# Altium PCB LoRaUNO868 V2.PcbDoc
Units mm, origin at the board's own origin, x right, y up, seen from the top; angles counter-clockwise.
Board outline 68.6 x 53.34 mm, 2 copper layers (Top Layer, Bottom Layer), stack 1.621 mm thick; 61 components, 57 nets, 269 pads, 268 vias.
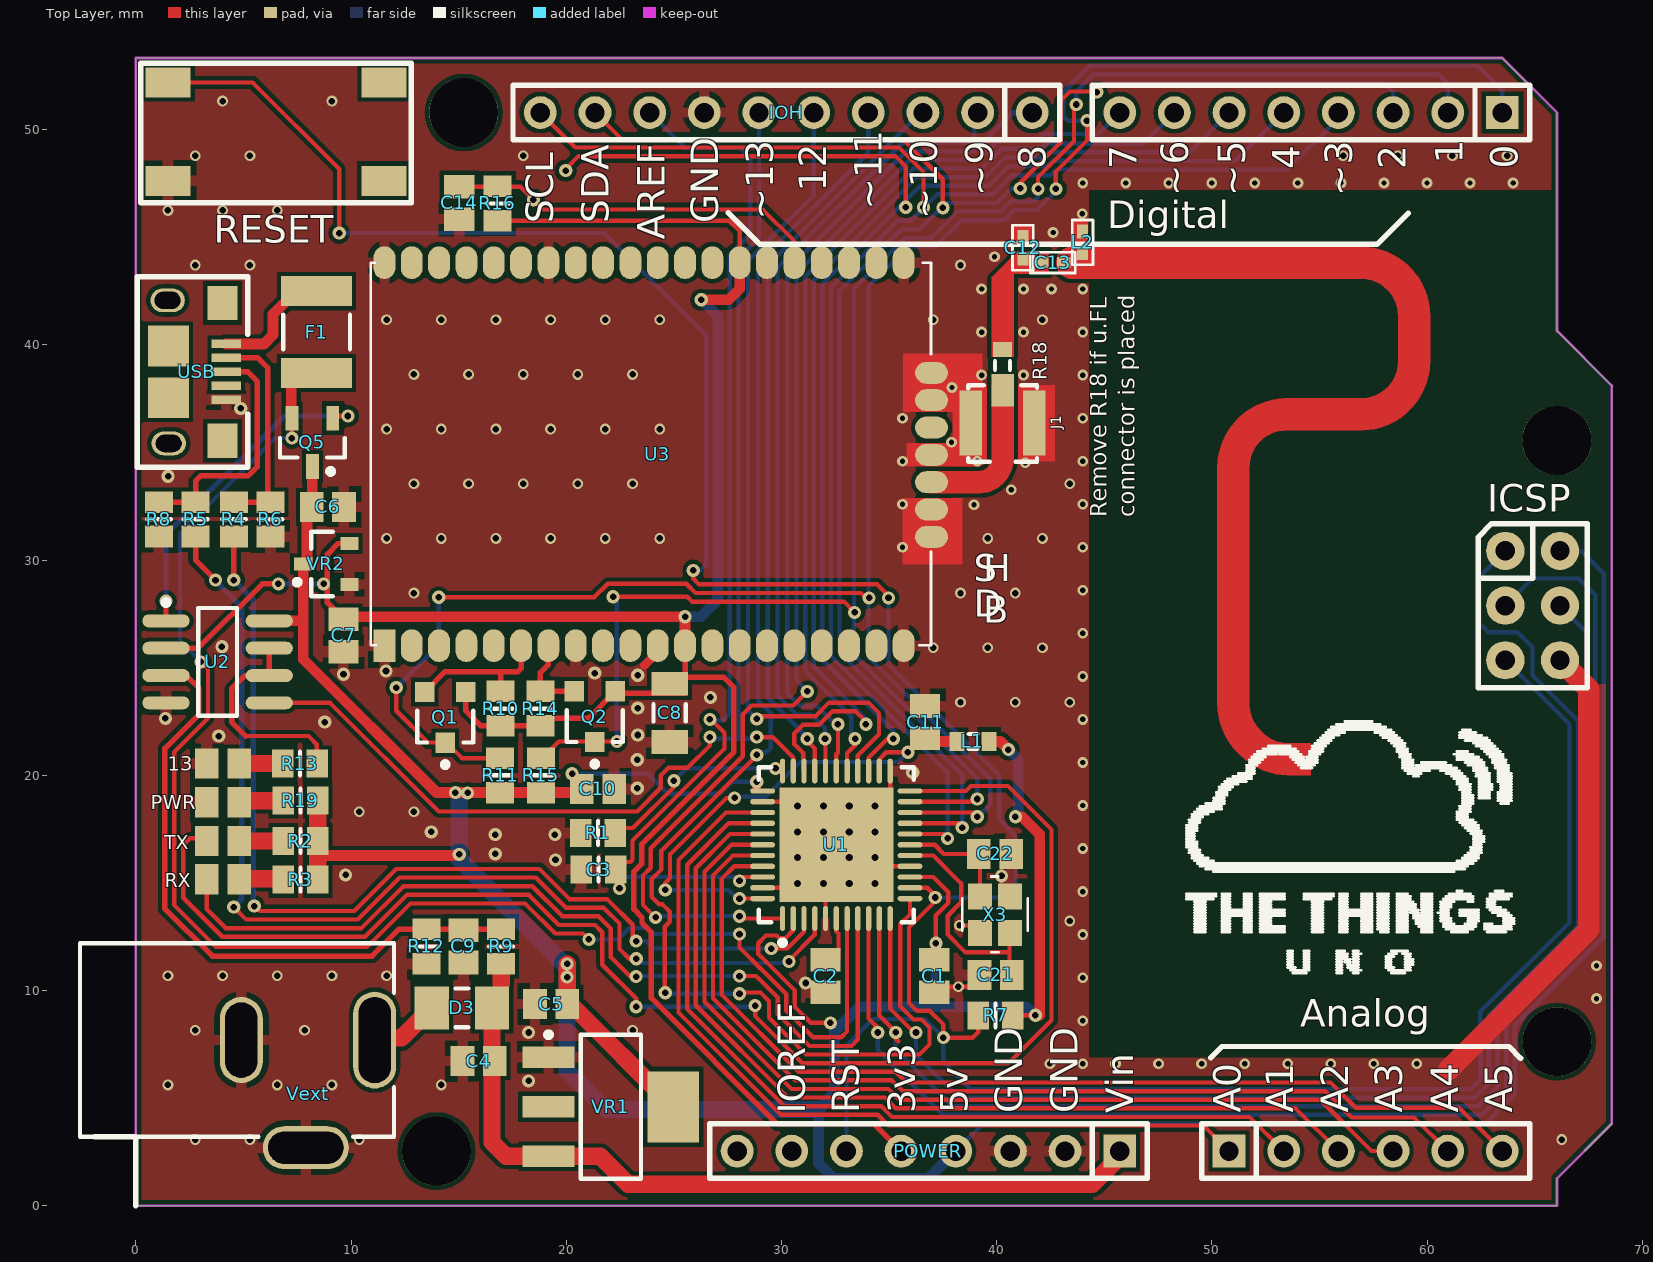
[diagram p0: Top Layer view]
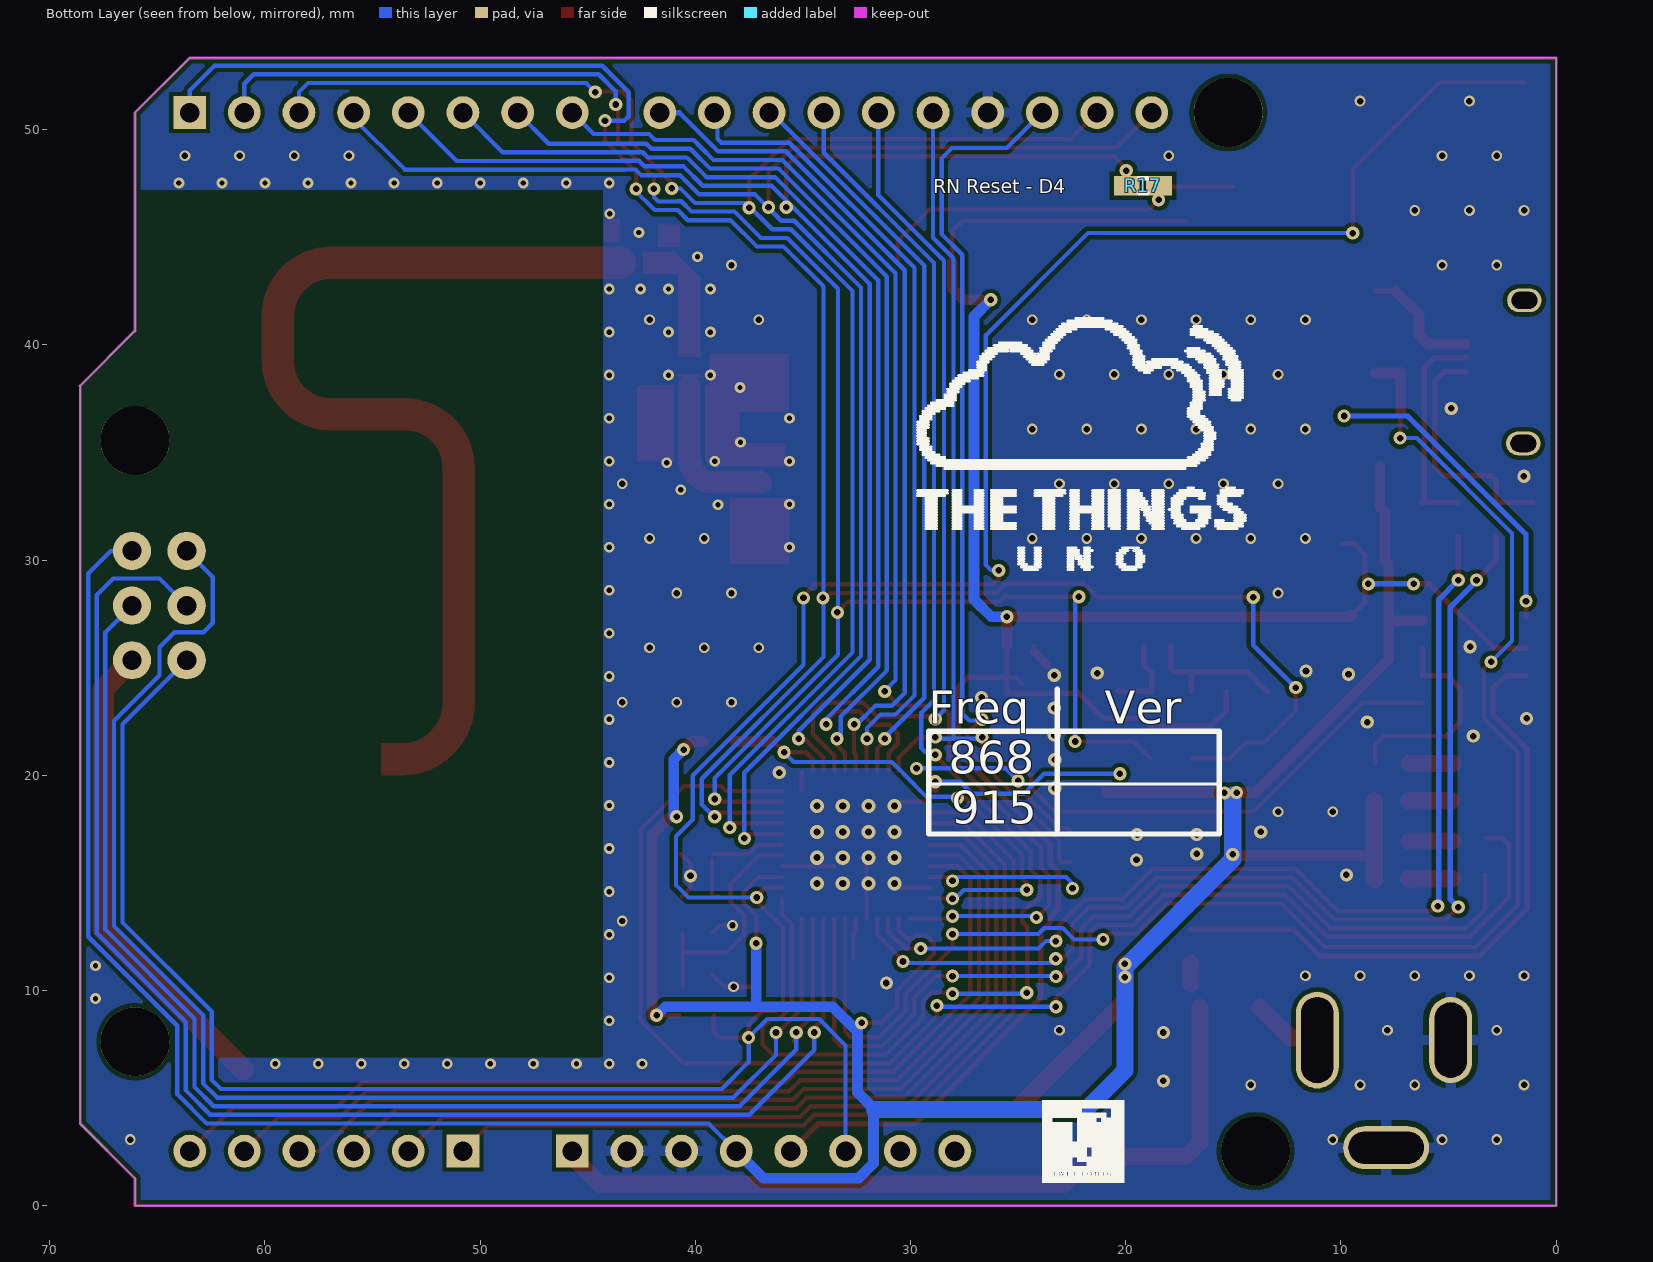
[diagram p1: Bottom Layer view, seen from below]

## Layer stack, top to bottom
Top Solder: solder mask 0.0102, Solder Resist, Dk 3.5
Top Layer: signal copper 0.0356
Dielectric1: core 1.55, FR-4, Dk 4.3
Bottom Layer: signal copper 0.0356
Bottom Solder: solder mask 0.0102, Solder Resist, Dk 3.5

## Board outline
0,0 0,53.34 63.5,53.34 66.04,50.8 66.04,40.64 66.06,40.64 68.6,38.1 68.58,38.1 68.58,3.81 66.04,1.27 66.04,0

## Design rules (kind name [scope] priority, off if disabled: settings)
Clearance [All] p1: gap=0.2
ComponentClearance [All] p1: gap=0.1 collisioncheckmode=3 verticalgap=0.254 showdistances=FALSE
PolygonConnect PolygonConnect_1 [isVia and innet(gnd)] p1: connectstyle=Direct reliefconductorwidth=0.254 reliefentries=4 polygonreliefangle="90 Angle" airgapwidth=0.254
PolygonConnect [All] p2: connectstyle=Relief reliefconductorwidth=0.5 reliefentries=4 polygonreliefangle="90 Angle" airgapwidth=0.254
RoutingVias [All] p1: holewidth=0.711 width=1.27 viastyle="Through Hole" minholewidth=0.711 minwidth=1.27 maxholewidth=0.711 maxwidth=1.27
SilkToSolderMaskClearance SilkscreenOverComponentPads [IsPad] p1 off: minsilkscreentomaskgap=0.254 clearancetoexposedcopper=TRUE
SolderMaskExpansion [All] p1: expansion=0.102
Width [All] p1: maxlimit=2 minlimit=0.2 preferedwidth=0.2
28 further rules are at their usual default settings.

## Components (designator, comment, footprint, x,y, rotation, side; value= is the part's Value field where it differs from the comment)
13 "LED0" C0805 4.05,20.55 r180 top
Analog "AD" "HEADER 6X1 8.5MM" 50.8,2.54 r0 top locked (schematic designator AD)
C1 "Cap" C0805 37.1,10.675 r270 top
C2 "Cap" C0805 32.05,10.675 r270 top
C3 "100nF" 6-0805_L 21.5,15.625 r0 top
C4 "Cap" C0805 15.925,6.725 r0 top
C5 "Cap" C0805 19.3,9.375 r0 top
C6 "Cap" C0805 8.925,32.475 r180 top
C7 "Cap" C0805 9.65,26.5 r90 top
C8 "Cap" C1206 24.8,22.9 r90 top
C9 "Cap" C0805 15.225,12.05 r90 top
C10 "Cap" C0805 21.475,19.375 r0 top
C11 "Cap" C0805 36.675,22.475 r90 top
C12 "TBD" 0402C-TBD 41.225,45.025 r270 top
C13 "TBD" 0402C-TBD 42.1,43.825 r0 top
C14 "Cap" C0805 15.025,46.6 r270 top
C21 "Cap" C0805 39.95,10.725 r0 top
C22 "Cap" C0805 39.925,16.35 r180 top
D3 "Diode" 3216[1206] 15.15,9.2 r0 top
Digital "IOL" "HEADER 8X1 8.5MM" 63.5,50.8 r180 top locked (schematic designator IOL)
F1 "Fuse 1" 1812 8.4,40.6 r90 top
ICSP "ICSP" ICSP 63.64,30.43 r0 top locked
IOH "IOH" "HEADER 10X1 8.5MM" 41.656,50.8 r180 top locked
J1 "U.FL-R-SMT" U.FL-R-SMT 40.275,36.375 r180 top
L1 "Inductor" J1-0603#1 38.9,21.575 r180 top
L2 "TBD" 0402C-TBD 44,45.275 r270 top
POWER "POWER_UNO" "HEADER 8X1 8.5MM" 45.72,2.54 r180 top locked
PWR "LED0" C0805 4.05,18.75 r180 top
Q1 "BSS138" SOT23 14.375,22.7 r180 top
Q2 "BSS138" SOT23 21.325,22.725 r180 top
Q5 "MOSFET-P" SOT23_N 8.2,35.475 r270 top
R1 "Res1" 6-0805_L 21.475,17.325 r0 top
R2 "Res1" 6-0805_L 7.65,16.95 r0 top
R3 "Res1" 6-0805_L 7.65,15.15 r0 top
R4 "Res1" 6-0805_L 4.55,31.9 r90 top
R5 "Res1" 6-0805_L 2.775,31.9 r90 top
R6 "Res Varistor" 6-0805_L 6.25,31.9 r90 top
R7 "Res1" 6-0805_L 39.95,8.85 r0 top
R8 "Res Varistor" 6-0805_L 1.075,31.9 r90 top
R9 "Res1" 6-0805_L 16.975,12.05 r270 top
R10 "Res1" 6-0805_L 16.95,23.1 r270 top
R11 "Res1" 6-0805_L 16.925,20 r270 top
R12 "Res1" 6-0805_L 13.5,12.05 r270 top
R13 "Res1" 6-0805_L 7.625,20.55 r0 top
R14 "Res1" 6-0805_L 18.8,23.1 r270 top
R15 "Res1" 6-0805_L 18.825,20 r270 top
R16 "Res1" 6-0805_L 16.8,46.575 r90 top
R17 "Res1" J1-0603#2 19.2,47.4 r180 bottom
R18 "Res1" J1-0603#1 40.275,39.05 r90 top
R19 "Res1" 6-0805_L 7.65,18.825 r0 top
RESET "SW-PB" BUTTON 1.5,52.2 r0 top
RX "LED0" C0805 4.05,15.175 r180 top
TX "LED0" C0805 4.05,16.95 r180 top
U1 "ATmega32U4-MU" 44PW_M 32.55,16.775 r90 top
U2 "LMV358M" M08A_N 3.8,25.275 r0 top
U3 "RN2483" "RN2483 - duplicate" 35.675,26.025 r90 top
USB "Header 5" 10118193-0001LF 4.875,38.75 r270 top
Vext "PWR2.5" "DC - JACK" -2.55,3.25 r0 top
VR1 "Volt Reg" SOT223_N 22.075,4.6 r0 top
VR2 "Volt Reg" SOT23_L 8.85,29.825 r180 top
X3 "16 Mhz" BT-XTAL_2520 39.925,13.525 r90 top

## Footprints (in the part's own frame and the unit in brackets; to place one, negate y for a bottom-side part, rotate by r counter-clockwise, add the part's x,y. Pads: shape width x height; smd on the part's side, far side on the other; paste and mask are expansions set on the pad)
6-0805_L [mm] "Chip Resistor, Body 2.0x1.2mm, IPC High Density"
  rect 1x1.3 smd: 1(-0.8,0) 2(0.8,0)
  silkscreen extent 0,-0.55 0,0.55, body extent -1.07,-0.7 1.07,0.7, height 0.7
44PW_M [mm] "QFN, 44-Leads, Body 7x7mm, Pitch 0.5mm, IPC Low Density"
  oval 1.15x0.25 smd: 1(-3.425,2.5) 2(-3.425,2) 3(-3.425,1.5) 4(-3.425,1) 5(-3.425,0.5) 6(-3.425,0) 7(-3.425,-0.5) 8(-3.425,-1) 9(-3.425,-1.5) 10(-3.425,-2) 11(-3.425,-2.5) 23(3.425,-2.5) 24(3.425,-2) 25(3.425,-1.5) 26(3.425,-1) 27(3.425,-0.5) 28(3.425,0) 29(3.425,0.5) 30(3.425,1) 31(3.425,1.5) 32(3.425,2) 33(3.425,2.5)
  oval 0.25x1.15 smd: 12(-2.5,-3.425) 13(-2,-3.425) 14(-1.5,-3.425) 15(-1,-3.425) 16(-0.5,-3.425) 17(0,-3.425) 18(0.5,-3.425) 19(1,-3.425) 20(1.5,-3.425) 21(2,-3.425) 22(2.5,-3.425) 34(2.5,3.425) 35(2,3.425) 36(1.5,3.425) 37(1,3.425) 38(0.5,3.425) 39(0,3.425) 40(-0.5,3.425) 41(-1,3.425) 42(-1.5,3.425) 43(-2,3.425) 44(-2.5,3.425)
  rect 5.3x5.3 smd: 45(0,0)
  silkscreen extent -4.67,-3.6 3.6,3.6, body extent -3.57,-3.57 3.57,3.57, height 1
0402C-TBD [mil]
  rect 25x20 smd: 1(0,0) 2(40,0)
  silkscreen extent -21,-19 61,19, body extent 2,-9 39,9, height 19
1812 [mm] "Chip Capacitor, Body 4.5x3.2mm, IPC High Density"
  rect 1.4x3.3 smd: 1(-1.9,0) 2(1.9,0)
  silkscreen extent -0.8,-1.55 0.8,1.55, body extent -2.4,-1.7 2.4,1.7, height 1.4
3216[1206] [mm] "Metal Electrode Face (MELF) Resistor; Body 3.2 x 1.8 mm (LxDia)"
  rect 1.6x2 smd: 1(-1.4,0) 2(1.4,0)
  silkscreen extent -0.3,-0.9 0.3,0.9
10118193-0001LF [mm] "Mirco USB Connector"
  rect 0.4x1.35 smd: 1(-1.3,-0.675) 2(-0.65,-0.675) 3(0,-0.675) 4(0.65,-0.675) 5(1.3,-0.675)
  oval 1.1x1.6 hole 0.8 slot 1.2 at 90 deg: ""(-3.325,-3.4) ""(3.325,-3.35)
  rect 1.6x1.4 smd: ""(-3.2,-0.85) ""(3.2,-0.85)
  rect 1.9x1.9 smd: ""(-1.2,-3.35) ""(1.2,-3.35)
  silkscreen extent -4.43,-4.8 4.43,0.33, body extent -3.98,-6.01 4.01,-0.59, height 2.77
BT-XTAL_2520 [mm]
  rect 1.2x1.1 smd: 1(-0.85,-0.7) 2(0.85,-0.7) 3(0.85,0.7) 4(-0.85,0.7)
  body extent -1.25,-1 1.27,1, height 0.56
BUTTON [mm]
  rect 2.1x1.4 smd: 1(0,0) 1(10.033,0) 2(0,-4.572) 2(10.033,-4.572)
  silkscreen extent -1.27,-5.59 11.3,0.89, body extent 1.14,-5.33 8.89,0.76, height 3
C0805 [mm] "Chip Capacitor, Body 2.0x1.3mm, IPC High Density"
  rect 1.1x1.4 smd: 1(-0.75,0) 2(0.75,0)
  body extent -1.1,-0.72 1.1,0.72, height 1.4
C1206 [mm] "Chip Capacitor, Body 3.2x1.6mm, IPC High Density"
  rect 1.1x1.7 smd: 1(-1.35,0) 2(1.35,0)
  silkscreen extent -0.4,-0.75 0.4,0.75, body extent -1.7,-0.9 1.7,0.9, height 1.3
"DC - JACK" [mm]
  oval 2x4.5 hole 1.5 slot 4 at 90 deg: 1(13.65,4.45)
  oval 2x4 hole 1.5 slot 3.5 at 90 deg: 2(7.45,4.45)
  oval 4x2 hole 1.5 slot 3.5 at 0 deg: 3(10.45,-0.55)
  silkscreen extent -0.05,-0.05 14.55,8.95, body extent -0.53,-0.62 13.87,8.92, height 11.2
"HEADER 6X1 8.5MM" [mil] "Stackable 6 pin header"
  rect 60x60 hole 35.43: 1(0,0)
  round 60 hole 35.43: 2(100,0) 3(200,0) 4(300,0) 5(400,0) 6(500,0)
  silkscreen extent -50,-50 550,50, body extent -50,-50 550,50, height 335
"HEADER 8X1 8.5MM" [mil] "Stackable 8 pin header"
  rect 60x60 hole 35.43: 1(0,0)
  round 60 hole 35.43: 2(100,0) 3(200,0) 4(300,0) 5(400,0) 6(500,0) 7(600,0) 8(700,0)
  silkscreen extent -50,-50 750,50, body extent -50,-50 750,50, height 335
"HEADER 10X1 8.5MM" [mil] "Stackable 10 pin header"
  round 60 hole 35.43: 1(0,0) 2(100,0) 3(200,0) 4(300,0) 5(400,0) 6(500,0) 7(600,0) 8(700,0) 9(800,0) 10(900,0)
  silkscreen extent -50,-50 950,50, body extent -50,-50 950,50, height 335
ICSP [mil]
  round 70 hole 35.43: 1(0,0) 2(100,0) 3(0,-100) 4(100,-100) 5(0,-200) 6(100,-200)
  silkscreen extent -50,-250 150,50, body extent -50,-250 150,50, height 485
J1-0603#1 [mm] "Chip Resistor, Body 1.6x0.8mm, IPC High Density"
  rect 0.7x0.9 smd: 1(-0.75,0) 2(0.75,0)
  silkscreen extent -0.2,-0.35 0.2,0.35, body extent -0.85,-0.48 0.85,0.48, height 0.9
J1-0603#2 [mm] "Chip Resistor, Body 1.6x0.8mm, IPC High Density"
  rect 1.2x0.9 smd: 1(-0.75,0) 2(0.75,0)
  silkscreen extent -0.2,-0.35 0.2,0.35, body extent -0.85,-0.48 0.85,0.48, height 0.9
M08A_N [mm] "SOIC, 8-Leads, Body 4.9x3.9mm, Pitch 1.27mm, IPC Medium Density"
  oval 2.2x0.6 smd: 1(-2.4,1.905) 2(-2.4,0.635) 3(-2.4,-0.635) 4(-2.4,-1.905) 5(2.4,-1.905) 6(2.4,-0.635) 7(2.4,0.635) 8(2.4,1.905)
  silkscreen extent -2.52,-2.5 0.9,2.88, body extent -2,-2.5 2,2.5, height 1.75
"RN2483 - duplicate" [mil]
  rect 60x40 smd: 1(0,949.8)
  oval 60x40 smd: 2(0,899.8) 3(0,849.8) 4(0,799.8) 5(0,749.8) 6(0,699.8) 7(0,649.8) 8(0,599.8) 9(0,549.8) 10(0,499.8) 11(0,449.8) 12(0,399.8) 13(0,349.8) 14(0,299.8) 15(0,249.8) 16(0,199.8) 17(0,149.8) 18(0,99.8) 19(0,49.8) 20(0,-0.2) 28(700.79,-0.2) 29(700.79,49.8) 30(700.79,99.8) 31(700.79,149.8) 32(700.79,199.8) 33(700.79,249.8) 34(700.79,299.8) 35(700.79,349.8) 36(700.79,399.8) 37(700.79,449.8) 38(700.79,499.8) 39(700.79,549.8) 40(700.79,599.8) 41(700.79,649.8) 42(700.79,699.8) 43(700.79,749.8) 44(700.79,799.8) 45(700.79,849.8) 45(700.79,899.8) 47(700.79,949.8)
  oval 40x60 smd: 21(199.21,-51.18) 22(249.21,-51.18) 23(299.21,-51.18) 24(349.21,-51.18) 25(399.21,-51.18) 26(449.21,-51.18) 27(499.21,-51.18)
  body extent 0,-48 700,973, height 71
SOT23 [mm] "SOT-23; 3 Leads; Body 3.1 x 2.5 mm, inc. leads (LxW max), Alternate Lead Configuration"
  rect 0.9x0.95 smd: 1(0,1.175) 2(0.95,-1.175) 3(-0.95,-1.175)
  silkscreen extent -1.3,-0.3 1.3,2.32
SOT23_L [mm] "SOT23, 3-Leads, Body 2.9x1.3mm, Pitch 0.95mm, Lead Span 2.3mm - Reverse Pinning, IPC High Density"
  rect 0.85x0.6 smd: 1(1.075,0) 2(-1.075,-0.95) 3(-1.075,0.95)
  silkscreen extent -0.3,-1.5 1.47,1.5, body extent -0.7,-1.5 0.7,1.5, height 1.1
SOT23_N [mm] "SOT23, 3-Leads, Body 2.9x1.3mm, Pitch 0.95mm, Lead Span 2.3mm - Reverse Pinning, IPC Medium Density"
  rect 1.15x0.6 smd: 1(1.125,0) 2(-1.125,-0.95) 3(-1.125,0.95)
  silkscreen extent -0.2,-1.5 1.47,1.5, body extent -0.7,-1.5 0.7,1.5, height 1.1
SOT223_N [mm] "SOT223, 4-Leads, Body 6.5x3.5mm, Pitch 2.3mm, Lead Span 7mm, IPC Medium Density"
  rect 2.4x1 smd: 1(-2.9,2.3) 2(-2.9,0) 3(-2.9,-2.3)
  rect 2.4x3.3 smd: 4(2.9,0)
  silkscreen extent -3.02,-3.35 1.4,3.47, body extent -1.85,-3.35 1.85,3.35, height 1.7
U.FL-R-SMT [mm]
  rect 1.05x1.5 smd: 1(0,-1.525)
  rect 1.05x3 smd: 2(-1.475,0) 3(1.475,0)
  silkscreen extent -1.6,-1.75 1.6,1.8, body extent -1.5,-1.55 1.5,1.55, height 1.25

## Part data
13 PWR RX TX: "Typical INFRARED GaAs LED"
C1 C2 C4 C5 C6 C7 C8 C9 C10 C11 C14 C21 C22: "Capacitor"
C3 C12 C13: library part Cap, "Capacitor, X7R"
D3: "Default Diode"
F1: "Fuse"
L2: library part Inductor, "Inductor"
Q1 Q2: "N-Channel Enhancement Mode Vertical DMOS FET"
Q5: "P-Channel MOSFET"
R1 R2 R3 R4 R5 R7 R9 R10 R11 R12 R13 R14 R15 R16 R17 R18 R19: "Resistor"
R6 R8: "Varistor (Voltage-Sensitive Resistor)"
RESET: "Switch"
U1: "8-bit AVR Microcontroller, 2.7-5.5V, 32KB Flash, 2.5KB EEPROM, 1KB SRAM, USB Controller, 44-pin QFN, Industrial Grade (-40°C to 85°C)"
U2: "General Purpose, Low Voltage, Rail-to-Rail Output Operational Amplifiers, 8-pin Narrow SOIC"
USB: "Header, 5-Pin"
Vext: "Low Voltage Power Supply Connector"
VR1 VR2: "Voltage Regulator"
X3: library part NX2520SA-16MHZ-STD-CSW-5, "XTAL SMD 2520, 16MHz, 8pF, ±15ppm"

## Free pads (board coordinates)
  round 3.2 hole 3.2 unplated: 0(13.97,2.54) 0(15.24,50.8) 0(66.04,7.62) 0(66.04,35.56)

## Via types
v1: diameter 0.61, hole 0.305, Top Layer to Bottom Layer, tented both sides, 113 vias
v2: diameter 0.5, hole 0.3, Top Layer to Bottom Layer, tented both sides, 78 vias
v3: diameter 0.5, hole 0.25, Top Layer to Bottom Layer, 61 vias
v4: diameter 0.66, hole 0.33, Top Layer to Bottom Layer, tented top, 16 vias

## Nets (pads, with @x,y where several pads share a name; then routed paths per layer and width w, separated by ;. In a path a pad name is that pad's centre, name@x,y a point inside that pad or via, vN(x,y) a via of type N, cw(c..) or ccw(c..) an arc to the next point about the centre after c; other vN are vias at no path point)
+3.3V: C7.2 C8.2 POWER.5 Q1.3 Q2.3 R10.2 R14.2 R16.1 U2.2 U3.12 U3.34 VR2.2 | length 110.9
  Top Layer w0.2: R16.1@17.175,45.775 27.575,45.775 28.06,45.29 U3.34 ; C8.2 25.1,24.55 C8.2@25.52,24.55
  Top Layer w0.254: U2.2 2.885,25.91 5.875,28.9 v1(6.625,28.9) ; C7.2@9.475,27.45 8.9,28.025 8.9,30.275 9.4,30.775 VR2.2 ; Q1.3 15.325,23.004 16.029,22.3 R10.2 R14.2 19.15,22.65 21.025,22.65 Q2.3 ; Q2.3@22.275,23.825 25.525,23.825 25.52,23.83 C8.2@25.52,24.55 ; U3.12 C8.2@25.52,24.55 ; POWER.5 34.3,3.8 29.8,3.8 23.957,9.643 23.957,12.702 23.519,13.139 23.519,13.406 23.143,13.782 23.143,15.522 23.502,15.881 23.502,16.792 27.777,21.067 27.777,24.098 27.325,24.55 C8.2@25.52,24.55
  Top Layer w0.5: C7.2@9.475,27.45 9.555,27.37 v1(25.52,27.37) U3.12 ; v1(26.275,42.1) 27.55,42.1 28.06,42.61 U3.34
  Bottom Layer w0.254: v1(6.625,28.9) v1(8.725,28.9)
  Bottom Layer w0.5: v1(25.52,27.37) 26.245,27.37 27.05,28.175 27.05,41.325 v1(26.275,42.1)
+5V: C1.1 C5.2 C6.2 C10.1 ICSP.2 L1.1 POWER.4 Q5.1 R2.2 R3.2 R7.2 R11.2 R15.2 R19.2 U1.2 U1.14 U1.34 U2.8 VR1.4 VR2.1 | length 192.3
  Top Layer w0.2: VR2.1 VR2.1@7.95,30 ; C6.2@7.95,32.25 C6.2 ; C5.2 C5.2@20.2,9.375 ; C10.1@20.875,19.2 C10.1@21.075,19.4 ; U1.2 30.55,12.799 30.176,12.425 29.907,12.425 29.777,12.555 29.276,12.555 28.922,12.201 28.922,11.7 29.276,11.346 29.283,11.346 30.625,10.004 30.625,9.236 31.361,8.5 v1(32.275,8.5) ; U1.14 37.055,15.275 37.755,14.576 37.755,14.074 37.175,13.495 v1(37.175,12.2) ; R7.2 v1(41.8,8.85)
  Top Layer w0.4: U1.34@28.851,19.375 v1(28.851,19.701)
  Top Layer w0.5: U2.8 7.73,27.18 ; VR2.1 7.775,25.4 13.975,19.2 R11.2 R15.2 C10.1@20.875,19.2 ; VR2.1@7.95,30 C6.2@7.95,32.25 ; C6.2@8.2,32.5 Q5.1 ; 8.45,16.275 v1@14.8,16.275 ; L1.1 40.175,21.575 v1(40.55,21.2) ; v1(40.875,18.075) 41.175,18.075 42,17.25 v1@42,8.85
  Top Layer w0.8: R3.2 R19.2 ; C5.2 v1@20.05,11.238 ; C5.2@20.2,9.375 VR1.4
  Bottom Layer w0.2: v1(20.275,20.075) 23.8,20.075 24.73,19.145 27.145,19.145 27.701,19.701 v1(28.851,19.701) ; POWER.4 39.385,3.825 62.713,3.825 64.075,5.187 64.075,8.362 68.217,12.504 68.217,29.383 67.17,30.43 ICSP.2
  Bottom Layer w0.5: 31.675,4.475 32.47,5.27 32.47,8.095 33.625,9.25 37.175,9.25 ; 31.725,4.475 31.725,1.975 32.425,1.275 36.835,1.275 POWER.4 ; v1(37.175,12.2) 37.175,9.25 ; v1(40.55,21.2) 41,20.75 v1@41,18.075 ; v1(41.8,8.85) 41.4,9.25 37.175,9.25
  Bottom Layer w0.8: v1@15.025,19.075 15.025,16.095 20.038,11.083 20.038,6.287 21.85,4.475 31.675,4.475
  other v1: 20.038,10.625 20.038,11.238 15.025,16.325 15.413,19.188 14.85,19.2
AD0: Analog.1 U1.36 | length 40.2
  Top Layer w0.2: U1.36 29.12,18.27 27.42,18.27 25.22,16.07 25.22,14.935 25.22,8.984 29.977,4.227 34.477,4.227 34.979,3.725 49.615,3.725 Analog.1
AD1: Analog.2 U1.37 | length 41.5
  Top Layer w0.2: U1.37 27.547,17.775 25.62,15.849 25.62,15.101 25.62,9.149 30.143,4.627 34.643,4.627 35.145,4.125 51.755,4.125 Analog.2
AD2: Analog.3 U1.38 | length 42.8
  Top Layer w0.2: U1.38 27.612,17.275 26.02,15.683 26.02,15.266 26.02,9.315 30.308,5.027 34.808,5.027 35.31,4.525 53.895,4.525 Analog.3
AD3: Analog.4 U1.39 | length 44.1
  Top Layer w0.2: U1.39 27.678,16.775 26.42,15.517 26.42,15.432 26.42,9.481 30.474,5.427 34.974,5.427 35.476,4.925 55.035,4.925 57.42,2.54 Analog.4
AD4: Analog.5 U1.40 | length 45.5
  Top Layer w0.2: U1.40 27.744,16.275 26.82,15.352 26.82,9.646 30.64,5.827 35.14,5.827 35.642,5.325 55.277,5.325 56.502,4.1 59.4,4.1 Analog.5
AD5: Analog.6 U1.41 | length 46.8
  Top Layer w0.2: U1.41 27.809,15.775 27.22,15.186 27.22,9.812 30.805,6.227 35.305,6.227 35.807,5.725 55.519,5.725 56.69,4.554 61.486,4.554 Analog.6
ANT: C13.2 L2.2 | length 45.7
  Top Layer w1.5: 43.5,43.825 56.925,43.825 cw(c56.925,41.35) 58.675,43.1 cw(c56.925,41.35) 59.4,41.35 59.4,39.25 ; 51.744,21.554 cw(c53.54,23.35) 51,23.35 51,34.3 cw(c53.475,34.3) 53.475,36.775 56.925,36.775 ccw(c56.925,39.25) 59.4,39.25 ; 51.81,21.487 ccw(c53.606,23.283) 53.606,20.743 53.775,20.743
ANT50: J1.1 R18.1 U3.23 | length 7.2
  Top Layer w1.05: U3.23 39.201,33.625 ccw(c39.201,34.649) 39.925,33.925 ccw(c39.08,34.77) 40.275,34.77 J1.1@40.275,38.05
AREF: C3.2 IOH.8 U1.42 | length 49.4
  Top Layer w0.2: C3.2@22.575,15.975 22.975,15.975 23.075,16.075 23.075,16.969 27.35,21.244 27.35,21.978 26.727,22.601 v1(26.676,22.601) 26.676,22.574 26.7,22.55 v1@26.75,22.6 ; v1(28.05,15.1) 28.225,15.275 U1.42
  Bottom Layer w0.2: v1(22.475,14.75) 22.475,14.975 22.78,15.28 27.92,15.28 28.05,15.15 v1(28.05,15.1) 28,15.1 v1@27.975,15.075 ; IOH.8 25.526,49.15 28.075,49.15 28.556,48.669 28.556,45.151 27.6,44.195 27.6,22.875 27.275,22.55 26.727,22.55 v1(26.676,22.601)
D+: R5.1 U1.4 | length 50.3
  Top Layer w0.2: v1(4.55,13.875) 5.125,13.3 10.315,13.3 12.265,15.25 18.584,15.25 19.984,13.85 21.734,13.85 22.471,13.113 22.471,11.929 22.924,11.476 v1(23.251,11.476) ; v1(30.35,11.35) 30.35,11.3 30.3,11.35 31.55,12.6 U1.4
  Top Layer w0.254: R5.1 2.775,30 v1(3.7,29.075)
  Bottom Layer w0.2: v1@23.25,11.477 23.447,11.28 v1@30.35,11.28
  Bottom Layer w0.254: v1@3.678,29.053 4.925,27.807 4.925,14.25 v1@4.425,13.75 ; v1(3.7,29.075) v1@3.75,29.125
D-: R4.1 U1.3 | length 47.2
  Top Layer w0.2: v1(5.5,13.925) 5.525,13.925 5.75,13.7 10.149,13.7 12.099,15.65 18.75,15.65 20.15,14.25 21.9,14.25 23.092,13.058 23.092,12.458 v1(23.25,12.3) ; v1(29.526,11.951) 29.531,11.955 30.272,11.955 31.05,12.733 U1.3
  Top Layer w0.254: v1(4.55,29.075) R4.1
  Bottom Layer w0.2: v1(23.25,12.3) 23.699,12.3 ; v1@23.25,12.375 v1@23.42,12.205 ; 23.699,12.301 24.049,11.951 v1(29.526,11.951)
  Bottom Layer w0.254: v1(4.55,29.075) 5.45,28.175 5.45,14.125 5.425,14.1 5.5,14.025 v1(5.5,13.925) v1@5.425,14
GND: 13.2 C1.2 C2.2 C3.1 C4.1 C5.1 C6.1 C7.1 C8.1 C9.1 C10.2 C11.2 C12.1 C14.2 C21.1 C22.1 ICSP.6 IOH.7 J1.2 J1.3 L2.1 POWER.2 POWER.3 PWR.2 R1.1 R6.1 R8.1 R12.2 RESET.2@1.5,47.628 U1.5 U1.15 U1.23 U1.35 U1.43 U1.45 U2.4 U3.1 U3.8 U3.11 U3.20 U3.21 U3.22 U3.24 U3.26 U3.27 U3.28 U3.33 U3.41 U3.47 USB.5 Vext.2 Vext.3 VR1.1 VR2.3 X3.2 X3.4 | length 39.7
  Top Layer w0.2: U3.11@24.25,25.739 U3.11 ; U1.43 U1.45@30.55,14.775 ; U1.35 U1.45@30.55,18.775 ; U1.5 U1.45@32.05,16.275 ; U1.45@33.55,15.775 U1.15 ; U1.45@35.05,19.275 U1.23 ; C1.2 37.35,10.175 v2(38.225,10.175) 38.65,10.175 C21.1 ; v2(38.275,13.025) 38.875,13.025 X3.4 ; X3.2 40.225,14.775 v1(40.225,15.325) 40.225,15.9 C22.1
  Top Layer w0.254: v3@38.911,34.582 ccw(c39.128,34.778) 39.421,34.798 ; v3@38.941,34.593 ccw(c38.936,34.921) J1.3@39.264,34.917
  Top Layer w0.4: 23.632,25.121 U3.11@24.25,25.739
  Top Layer w1: 61,6.325 67.525,12.85 67.525,24.005 ICSP.6
  other v1: 18.25,5.8 18.25,8.05 31.125,10.35 9.75,15.375 19.5,16.075 16.7,16.35 16.7,17.25 19.475,17.25 13.725,17.375 23.3,19.4 36.1,20.125 23.3,20.725 3.85,21.825 23.325,21.875 8.775,22.475 1.375,22.65 23.325,23.125 26.7,23.625 23.325,24.65 9.65,24.7 21.325,24.75 11.625,24.85 4,25.975 1.5,33.9 4.875,37.05
  other v2: 2.76,3.073 5.3,3.073 10.38,3.073 66.26,3.073 1.49,5.613 6.57,5.613 9.11,5.613 14.19,5.613 2.76,8.153 7.84,8.153 23.08,8.153 1.49,10.693 4.03,10.693 6.57,10.693 9.11,10.693 11.65,10.693 43.4,13.233 10.38,18.313 12.92,18.313 38.32,23.393 40.86,23.393 43.4,23.393 37.05,25.933 39.59,25.933 42.13,25.933 12.92,28.473 38.32,28.473 40.86,28.473 11.65,31.013 14.19,31.013 16.73,31.013 19.27,31.013 21.81,31.013 24.35,31.013 39.59,31.013 42.13,31.013 12.92,33.553 15.46,33.553 18,33.553 20.54,33.553 23.08,33.553 43.4,33.553 11.65,36.093 14.19,36.093 16.73,36.093 19.27,36.093 21.81,36.093 24.35,36.093 12.92,38.633 15.46,38.633 18,38.633 20.54,38.633 23.08,38.633 11.65,41.173 14.19,41.173 16.73,41.173 19.27,41.173 21.81,41.173 24.35,41.173 37.05,41.173 42.13,41.173 2.76,43.713 5.3,43.713 38.32,43.713 1.49,46.253 4.03,46.253 6.57,46.253 2.76,48.793 5.3,48.793 18,48.793 56.1,48.793 58.64,48.793 61.18,48.793 63.72,48.793 4.03,51.333 9.11,51.333
  other v3: 42.475,6.6 44,6.6 45.525,6.6 47.525,6.6 49.525,6.6 51.525,6.6 53.525,6.6 55.525,6.6 57.525,6.6 59.525,6.6 44,8.6 67.875,9.625 44,10.6 67.875,11.15 44,12.6 44,14.6 44,16.6 44,18.6 44,20.6 44,22.6 44,24.6 44,26.6 44,28.6 35.625,30.6 44,30.6 38.95,32.575 35.625,32.6 44,32.6 40.675,33.275 41.325,34.525 35.625,34.6 39.1,34.6 44,34.6 37.9,35.475 35.625,36.6 44,36.6 37.925,38.025 39.3,38.6 41.25,38.6 44,38.6 39.3,40.6 41.25,40.6 44,40.6 39.3,42.6 41.25,42.6 42.55,42.6 44,42.6 39.9,44.1 42.625,45.225 43.975,46.1 44,47.525 46,47.525 48,47.525 50,47.525 52,47.525 54,47.525 56,47.525 58,47.525 60,47.525 62,47.525 64,47.525
  other v4: 30.75,14.975 31.95,14.975 33.15,14.975 34.35,14.975 30.75,16.175 31.95,16.175 33.15,16.175 34.35,16.175 30.75,17.375 31.95,17.375 33.15,17.375 34.35,17.375 30.75,18.575 31.95,18.575 33.15,18.575 34.35,18.575
IO0: Digital.1 Q1.1 R11.1 U1.20 | length 102.3
  Top Layer w0.2: v1@12.1,23.851 v1(12.1,24.075) 12.1,23 13.575,21.525 Q1.1 ; v1(14.075,28.275) 21.295,28.275 21.924,28.905 25.58,28.905 26.009,28.475 33.691,28.475 33.916,28.25 v1(34.075,28.25) ; Q1.1@14.451,21.5 15.151,20.8 R11.1 ; U1.20 38.9,18.275 v1(39.1,18.075) ; v1(42.752,47.252) 42.752,48.061 44.2,49.509 v1(44.2,50.425)
  Bottom Layer w0.2: v1(12.1,24.075) 14.075,26.05 v1(14.075,28.275) ; v1(39.1,18.075) 39.321,18.296 39.352,18.296 39.707,18.65 39.707,19.84 34.05,25.497 34.05,42.725 35.9,44.575 37.141,44.575 38.366,45.8 40.35,45.8 40.82,46.27 41.891,46.27 42.873,47.252 v1(42.752,47.252) ; v1(44.2,50.425) 43.3,50.425 43.095,50.63 43.095,51.745 44.327,52.977 62.35,52.977 63.5,51.827 Digital.1
IO1: Digital.2 Q2.1 R15.1 U1.21 | length 87.4
  Top Layer w0.2: R15.1 18.874,20.8 19.649,21.575 v1(22.35,21.575) 21.35,21.575 Q2.1 ; v1(22.175,28.3) 25.619,28.3 25.844,28.075 32.9,28.075 v1(33.4,27.575) ; U1.21 35.98,18.78 38.774,18.78 v1@38.874,18.88 ; v1(41.925,47.25) 41.925,47.8 43.595,49.47 43.595,51.07 v1(43.7,51.175)
  Bottom Layer w0.2: v1(22.175,28.3) 22.35,28.125 v1(22.35,21.575) ; v1@39.102,18.775 39.102,19.879 33.375,25.606 33.375,42.616 35.734,44.975 36.955,44.975 38.18,46.2 40.184,46.2 40.659,46.675 40.845,46.675 40.849,46.67 41.725,46.67 41.925,46.87 v1(41.925,47.25) ; v1(43.7,51.175) 43.7,51.784 44.492,52.577 60.525,52.577 60.96,52.142 Digital.2
  other v1: 39.102,18.901
IO2: Digital.3 IOH.9 U1.19 | length 80.8
  Top Layer w0.2: IOH.9 22.561,49.575 35.625,49.575 37.5,47.7 v1(37.5,46.375) ; U1.19 38.203,17.775 v1(38.402,17.576) ; v1(41.1,47.275) 41.1,47.541 42.975,49.416 42.975,51.35 43.405,51.78 44.62,51.78 v1(44.65,51.75)
  Bottom Layer w0.2: v1@38.345,17.633 v1(38.402,17.576) 38.402,20.014 32.7,25.716 32.7,42.506 35.569,45.375 36.43,45.375 37.655,46.6 40.019,46.6 40.694,47.275 v1(41.1,47.275) ; v1(44.65,51.75) 45.077,52.177 58,52.177 58.42,51.757 Digital.3
IO3: Digital.4 IOH.10 U1.18 | length 77.4
  Top Layer w0.2: IOH.10 20.421,49.175 35.459,49.175 36.602,48.033 v1(36.602,46.402) ; U1.18 37.525,17.275 v1(37.725,17.075)
  Bottom Layer w0.2: v1(37.725,17.075) 37.725,20.125 32.3,25.55 32.3,42.672 35.403,45.775 36.005,45.775 37.23,47 39.819,47 40.702,47.883 42.504,47.883 42.775,48.155 43.301,48.155 43.305,48.15 53.5,48.15 55.88,50.53 Digital.4
IO4: Digital.5 R17.1 U1.25 | length 67.4
  Top Layer w0.2: v1@20.05,48.25 20.575,48.775 35.294,48.775 35.775,48.294 v1(35.775,46.4) ; U1.25 34.05,20.817 34.933,21.7 35.201,21.7 v1(35.202,21.701)
  Bottom Layer w0.2: v1(35.202,21.701) 35.202,22.073 35.2,22.075 31.9,25.375 31.9,42.838 36.462,47.4 39.653,47.4 40.553,48.3 42.355,48.3 42.61,48.555 43.466,48.555 43.471,48.55 51.09,48.55 Digital.5
  other v1: 19.975,48.1
IO5: Digital.6 U1.31 | length 50.2
  Top Layer w0.2: U1.31 31.02,20.23 31.02,21.03 30.954,21.096 30.951,21.096 30.595,21.452 30.595,21.95 30.995,22.35 31.745,22.35 32.374,22.98 33.449,22.98 33.927,22.502 v1(33.927,22.376)
  Bottom Layer w0.2: v1(33.927,22.376) 33.927,22.519 33.977,22.569 31.5,25.046 31.5,43.003 36.297,47.8 39.488,47.8 40.396,48.708 42.197,48.708 42.444,48.955 43.632,48.955 43.637,48.95 48.95,48.95 Digital.6
IO6: Digital.7 U1.27 | length 44.5
  Top Layer w0.2: U1.27 33.05,21.025 33.425,21.4 v1(33.425,21.7)
  Bottom Layer w0.2: v1@33.388,21.637 33.245,21.78 33.245,22.735 31.1,24.88 31.1,43.169 36.131,48.2 39.322,48.2 40.169,49.047 40.169,49.05 40.245,49.125 42.049,49.125 42.278,49.355 43.798,49.355 43.802,49.35 46.81,49.35 Digital.7
IO7: Digital.8 U1.1 | length 58.7
  Top Layer w0.2: v1(24.151,13.401) 23.57,13.982 23.57,15.345 23.929,15.704 23.929,16.615 28.204,20.89 28.204,22.834 28.62,23.25 30.55,23.25 v1(31.2,23.9) ; v1@28.051,13.35 U1.1
  Bottom Layer w0.2: v1(24.151,13.401) 24.216,13.465 28.037,13.465 v1(28.051,13.451) ; v1(31.2,23.9) 31.2,23.925 30.7,24.425 30.7,43.335 35.965,48.6 39.156,48.6 39.769,49.213 39.769,49.215 40.079,49.525 41.883,49.525 42.158,49.8 44.72,49.8 Digital.8
IO8: IOH.1 U1.28 | length 39.2
  Top Layer w0.2: U1.28 32.55,20.975 32.63,21.055 32.63,22.37 v1(32.625,22.375)
  Bottom Layer w0.2: v1(32.625,22.375) 32.5,22.375 31.645,23.23 30.87,23.23 30.27,23.83 30.27,43.471 35.8,49 38.95,49 40.75,50.8
  Bottom Layer w0.254: 40.75,50.8 IOH.1
IO9: IOH.2 U1.29 | length 38.3
  Top Layer w0.2: v1(32.025,21.7) 32.05,21.675 U1.29
  Bottom Layer w0.2: v1(32.025,21.7) 32.025,22.12 32.02,22.124 32.02,22.205 31.395,22.83 30.705,22.83 29.819,23.715 29.819,43.585 35.634,49.4 38.784,49.4 38.969,49.585 IOH.2@38.969,50.8
  Bottom Layer w0.254: IOH.2@38.969,50.8 IOH.2 38.875,50.8 IOH.2@39.15,50.525
IO10: IOH.3 U1.30 | length 34.7
  Top Layer w0.2: v1(31.202,21.701) 31.101,21.701 31.1,21.7 31.55,21.25 U1.30
  Bottom Layer w0.2: v1(31.202,21.701) 31.202,21.767 29.365,23.604 29.365,43.697 36.52,50.852 IOH.3@36.524,50.852
IO11: IOH.4 U1.12 | length 68.3
  Top Layer w0.2: v1@24.575,9.85 v1@24.575,9.874 ; v1(24.601,9.9) v1@24.575,9.874 ; v1@28.151,9.9 28.157,9.905 29.027,9.905 29.425,9.507 29.425,8.739 31.137,7.027 35.637,7.027 35.639,7.025 36.41,7.025 36.88,7.495 36.88,8.278 36.502,8.655 36.13,8.655 35.525,9.26 35.525,13.091 35.975,13.541 U1.12 ; v1(28.85,20.95) 28.85,20.925 24.42,16.495 24.42,15.63 23.97,15.18 23.97,14.355 24.32,14.005 24.47,14.005 24.806,13.669 24.806,13.199 24.575,12.969 v1@24.575,9.874
  Bottom Layer w0.2: v1(24.601,9.9) 24.651,9.85 v1(28.051,9.85) v1@28.15,9.85 ; v1@28.825,20.925 28.975,21.075 29.3,21.075 29.5,21.275 29.5,22.903 28.911,23.492 28.911,43.809 34.036,48.934 IOH.4
IO12: IOH.5 U1.26 | length 39.4
  Top Layer w0.2: v1(28.85,22.625) 28.85,22.622 28.751,22.524 28.8,22.475 29.075,22.75 31.579,22.75 32.209,23.38 34.045,23.38 34.531,22.894 34.531,21.906 33.55,20.925 U1.26
  Bottom Layer w0.2: v1@28.736,22.511 v1(28.85,22.625) 28.45,23.025 28.45,43.913 31.496,46.959 IOH.5
IO13: IOH.6 U1.32 U2.5 | length 59.2
  Top Layer w0.2: U2.5 9.027,23.37 14.072,18.325 23.3,18.325 24.395,19.42 24.395,20.001 24.749,20.355 25.641,20.355 26.675,21.389 v1(26.675,21.775) ; v1(28.851,21.776) v1@28.949,21.776 ; v1@29,21.725 v1@28.949,21.776 ; U1.32 30.55,20.825 29.599,21.776 v1@28.949,21.776
  Bottom Layer w0.2: v1@26.675,21.7 28.003,21.7 ; v1@28.675,21.876 28.775,21.776 v1(28.851,21.776) ; v1@28.775,21.7 28.003,21.7 ; IOH.6 28.956,44.985 28.003,44.032 28.003,21.7
IOREF: POWER.7
LORA_RX: Q2.2 R14.1 U3.7 | length 3.9
  Top Layer w0.254: U3.7 19.17,25.145 18.8,24.775 R14.1 Q2.2
LORA_TX: Q1.2 R10.1 U3.6 | length 6.9
  Top Layer w0.254: Q1.2 14.375,24.825 16.775,24.825 17.75,24.825 17.9,24.975 U3.6 ; R10.1 16.95,24.8
MISO: ICSP.1 U1.11 | length 64.2
  Top Layer w0.2: U1.11 35.05,9.169 v1@36.21,8.009
  Bottom Layer w0.2: v1(36.252,8.05) 36.252,7.009 38.235,5.025 62.216,5.025 62.875,5.684 62.875,8.859 67.017,13.001 67.017,22.539 64.9,24.656 64.9,25.95 64.2,26.65 62.85,26.65 62.425,27.075 62.425,29.215 ICSP.1
MOSI: ICSP.4 U1.10 | length 61.1
  Top Layer w0.2: U1.10 34.55,8.83 v1@35.318,8.063 ; v1@35.121,8.054 v1(35.31,8.054) 35.31,7.756 35.425,7.64
  Bottom Layer w0.2: v1(35.31,8.054) 35.31,7.26 37.945,4.625 62.381,4.625 63.275,5.519 63.275,8.694 67.417,12.835 67.417,26.653 ICSP.4
Net13_1: 13.1 R13.1 | length 2
  Top Layer w0.8: 13.1 R13.1
NetC2_1: C2.1 U1.6 | length 1.9
  Top Layer w0.2: U1.6 32.55,12.75 32.65,12.65 C2.1@32.65,11.5
NetC9_2: C9.2 R9.1 R12.1 U2.3 | length 29.7
  Top Layer w0.254: U2.3 2.335,24.64 2.925,24.05 2.925,22.829 1.35,21.254 1.35,13.8 3.55,11.6 10.975,11.6 12.225,12.85 R12.1 R9.1
NetC11_1: C11.1 L1.2 U1.24 U1.44 | length 24.2
  Top Layer w0.2: v1(24.6,14.675) 24.775,14.675 24.6,14.85 24.6,15 24.82,15.22 24.82,16.33 27.441,18.95 v1(27.825,18.95) ; v1(28.05,14.275) U1.44@29.124,14.275 ; U1.24 34.55,20.751 34.874,21.075 35.85,21.075 36.375,21.6 C11.1@36.4,21.575
  Top Layer w0.5: C11.1@36.4,21.575 L1.2
  Bottom Layer w0.2: v1(24.6,14.675) 27.527,14.675 27.927,14.275 v1(28.05,14.275) v1@28.03,14.275 ; v1@27.85,19 29.255,19 30.33,20.074 30.33,20.08 30.875,20.625 35.425,20.625 v1(35.875,21.075)
NetC12_2: C12.2 C13.1 R18.2
NetC14_1: C14.1 R16.2 R17.2 U3.32 | length 17.6
  Top Layer w0.2: C14.1 17.875,47.35 v1(18.475,46.75) 18.925,46.3 29.125,46.3 30.6,44.825 U3.32
NetC21_2: C21.2 U1.16 X3.1 | length 11.3
  Top Layer w0.2: U1.16 37.055,16.275 38.35,14.98 38.35,14.104 37.725,13.479 37.725,12.601 38.551,11.775 39.899,11.775 40.575,11.775 ; C21.2@40.6,10.175 40.6,12.65 X3.1
NetC22_2: C22.2 U1.17 X3.3 | length 5.3
  Top Layer w0.2: U1.17 37.121,16.775 37.546,16.35 C22.2 ; X3.3@38.925,14.375 X3.3 ; X3.3@39.225,14.466 C22.2@39.225,16.1
NetD3_1: D3.1 Vext.1 | length 3.3
  Top Layer w0.8: Vext.1 11.2,7.8 12.35,7.8 D3.1
NetF1_2: F1.2 USB.1 | length 5.8
  Top Layer w0.254: F1.2@7.45,42.5 F1.2
  Top Layer w0.5: USB.1 5.95,40.05 6.375,40.475 6.375,41.425 F1.2@7.45,42.5
NetPWR_1: PWR.1 R19.1 | length 2
  Top Layer w0.8: PWR.1@4.875,18.825 R19.1
NetQ5_2: Q5.3 U2.1 | length 15.2
  Top Layer w0.254: U2.1@1.4,27.375 v1(1.4,28.1) ; Q5.3@9.25,36.7 v1(9.85,36.7)
  Bottom Layer w0.254: v1(1.4,28.1) 1.4,31.2 6.9,36.7 v1(9.85,36.7)
NetR1_2: R1.2 U1.33 | length 8.6
  Top Layer w0.2: R1.2@22.625,17.325 22.625,17.55 23.091,17.55 25,19.459 v1(25,19.75)
  Bottom Layer w0.2: v1(25,19.75) 25.575,20.325 v1(29.725,20.325)
NetR2_1: R2.1 TX.1 | length 2
  Top Layer w0.8: TX.1 R2.1@6.825,16.95
NetR3_1: R3.1 RX.1 | length 2.1
  Top Layer w0.8: RX.1@4.825,15.2 6.85,15.2 R3.1@6.825,15.175
NetR4_2: R4.2 R6.2 USB.2 | length 10.1
  Top Layer w0.254: USB.2 5.675,39.4 6.125,38.95 6.125,32.825 R6.2 R4.2
NetR5_2: R5.2 R8.2 USB.3 | length 11.4
  Top Layer w0.254: R8.2 R5.2 2.775,33.675 3.025,33.925 5.225,33.925 5.65,34.35 5.65,38.3 5.2,38.75 USB.3
NetR13_2: R13.2 U2.6 U2.7 | length 10.1
  Top Layer w0.2: 5.1,21.825 8.025,21.825 8.4,21.45 R13.2@8.4,20.55
  Top Layer w0.254: 5.1,21.825 4.45,22.475 4.45,24.025 5.065,24.64 U2.6 U2.7
RESET: ICSP.5 POWER.6 R7.1 RESET.1@1.5,52.2 U1.13 | length 144.6
  Top Layer w0.2: RESET.1@1.5,52.2 5.425,52.2 9.45,48.175 v1(9.45,45.2) ; v1(25.9,29.525) 25.9,29.15 26.175,28.875 34.45,28.875 34.975,28.35 v1(34.975,28.25) ; U1.13 36.775,14.775 37.275,14.275 35.925,12.925 35.925,9.426 36.296,9.055 36.895,9.055 37.525,8.425 v1(37.525,7.813) 38.888,7.813 39.15,8.075 R7.1
  Bottom Layer w0.2: v1(9.45,45.2) 21.75,45.2 26.5,40.45 26.5,29.775 26.25,29.525 v1(25.9,29.525) ; POWER.6 33.02,7.45 34.245,8.675 36.663,8.675 v1(37.525,7.813) 37.525,6.675 38.775,5.425 62.05,5.425 62.475,5.85 62.475,9.025 66.617,13.167 66.617,22.373 ICSP.5 ICSP.5@63.64,25.019 ; v1(34.975,28.25) 34.975,25.138 40.124,19.988 40.124,17.951 40.9,17.175 40.9,14.9 40.325,14.325 v1@37.125,14.325
  other v1: 37.15,14.325
SCK: ICSP.3 U1.9 | length 67
  Top Layer w0.2: U1.9 34.05,8.7 34.475,8.275 v1(34.475,8.05)
  Bottom Layer w0.2: v1(34.475,8.05) 34.475,7.245 37.495,4.225 62.547,4.225 63.675,5.353 63.675,8.528 67.817,12.669 67.817,28.383 67.05,29.15 64.9,29.15 ICSP.3
USB_RX_LED: RX.2 U1.8 | length 42.8
  Top Layer w0.2: RX.2@3.3,15.375 3.3,13.777 4.177,12.9 10.48,12.9 12.43,14.85 18.419,14.85 19.819,13.45 21.5,13.45 22.071,12.879 22.071,11.554 22.975,10.65 v1(23.25,10.65) ; v1(28.05,10.675) 28.815,10.675 28.945,10.546 28.952,10.546 29.825,9.673 29.825,8.904 31.302,7.427 33.252,7.427 33.55,7.725 U1.8
  Bottom Layer w0.2: v1@23.484,10.675 v1(28.05,10.675)
USB_TX_LED: TX.2 U1.22 | length 67.8
  Top Layer w0.2: 2.2,16.775 2.5,17.075 TX.2@3.3,17.075 ; 2.2,16.875 2.2,14.311 4.011,12.5 10.646,12.5 12.596,14.45 18.253,14.45 19.653,13.05 21.334,13.05 21.671,12.713 21.671,11.203 23.25,9.625 v1(23.25,9.25) ; v1(28.776,9.3) 28.776,8.822 30.971,6.627 35.471,6.627 35.473,6.625 40.553,6.625 42.55,8.622 42.55,17.478 40.522,19.506 38.804,19.506 38.573,19.275 U1.22
  Bottom Layer w0.2: v1(23.25,9.25) 23.254,9.246 28.68,9.246 28.701,9.225 v1(28.776,9.3) v1@28.99,9.3
VIN: C4.2 D3.2 POWER.1 R9.2 VR1.3 | length 37.9
  Top Layer w0.8: D3.2 16.55,2.95 17.2,2.3 VR1.3 21.575,2.3 22.875,1 44.45,1 45.72,2.27 POWER.1 ; 16.975,10.325 R9.2
VUSB: F1.1 Q5.2 U1.7 | length 71.9
  Top Layer w0.2: v1(3.025,25.275) 3.352,24.948 3.352,22.652 1.777,21.077 1.777,13.977 3.727,12.027 10.739,12.027 12.762,14.05 18.087,14.05 19.487,12.65 20.777,12.65 v1(21.051,12.376) v1@21.051,12.524 ; v1(7.25,35.675) Q5.2 ; v1@27.851,12.626 v1(28.051,12.626) 28.051,12.005 29.11,10.946 29.118,10.946 30.225,9.839 30.225,9.07 31.468,7.827 32.777,7.827 33.05,8.1 U1.7
  Top Layer w0.5: Q5.2@7.225,36.85 7.225,38.725 7.25,38.7 F1.1
  Bottom Layer w0.2: v1(3.025,25.275) 2.05,26.25 2.05,31.246 6.479,35.675 v1(7.25,35.675) ; v1(21.051,12.376) 22.401,12.376 22.93,12.905 23.791,12.905 24.071,12.626 v1(28.051,12.626)
pads on no net: POWER.8 RESET.1@11.533,52.2 RESET.2@11.533,47.628 U3.2 U3.3 U3.4 U3.5 U3.9 U3.10 U3.13 U3.14 U3.15 U3.16 U3.17 U3.18 U3.19 U3.25 U3.29 U3.30 U3.31 U3.35 U3.36 U3.37 U3.38 U3.39 U3.40 U3.42 U3.43 U3.44 U3.45 USB. USB.4 VR1.2

## Polygon pours and split planes (outlines as drawn)
GND on Bottom Layer "Top-GND" (solid, remove dead copper, pour order 4): -1.825,54.45 -1.3,54.975 70.375,54.975 70.375,-0.75 70.05,-1.075 69.725,-0.75 -1.65,-0.75
GND on Top Layer "Top-GND" (solid, remove dead copper, pour order 3): -1.775,54.4 -1.25,54.925 70.425,54.925 70.425,-0.8 70.1,-1.125 69.775,-0.8 -1.6,-0.8

## Keep-outs
Keep-Out Layer:
  lines w0.127: 66.04,40.64 66.04,50.8 63.5,53.34 0,53.34 0,0 66.04,0 66.04,1.27 68.58,3.81 68.58,38.1 ; 66.06,40.64 68.6,38.1

## Other copper
Top Layer:
  rectangle net ANT50: 39.75,38.5 40.8,38.65
  rectangle net NetC12_2: 39.75,39.45 40.8,43.125
  rectangle net NetC12_2: 40.975,43.3 42.425,44.35
  rectangle net ANT: 53.7,20 54.6,21.5
  rectangle net GND: 35.625,29.8 38.425,32.892
  rectangle net GND: 35.8,34.35 39.125,35.445
  rectangle net GND: 35.65,36.879 39.35,39.6
  rectangle net GND: 40.717,44.554 41.733,45.597
  rectangle net GND: 43.492,44.781 44.25,45.846
  rectangle net GND: 41,34.575 42.708,38.129
  rectangle net GND: 37.958,34.801 39.55,38.129
  region net NetC12_2: 40.8,43.125 40.8,43.3 40.975,43.3 40.975,44.35 39.75,43.125
  pour cut-out: 39.598,38.802 39.598,39.437 39.585,39.45 40.965,39.45 40.965,38.815 40.952,38.802
Multi-Layer:
  pour cut-out: 44.275,47.225 44.275,6.875 62.1,6.875 67.75,12.85 67.75,24.225 68.58,24.225 68.58,38.08 68.6,38.1 66.06,40.64 66.04,40.64 66.04,47.225

## Silkscreen, mask and mechanical layers (free items; w line width, h text height)
Top Overlay:
  drawing of 420 lines, arcs and shapes, not listed
  text "L" at 12.2,56.2 h1.27
  text "1" at 61.65,48.425 h1.27 r90
  text "0" at 64.225,48.2 h1.27 r90
  text "8" at 42.275,48.175 h1.27 r90
  text "7" at 46.5,48.175 h1.27 r90
  text "4" at 54.075,48.175 h1.27 r90
  text "2" at 59,48.175 h1.27 r90
  text "12" at 32.075,47.125 h1.27 r90
  text "~9" at 39.825,46.9 h1.27 r90
  text "~6" at 48.9,46.9 h1.27 r90
  text "~5" at 51.55,46.9 h1.27 r90
  text "~3" at 56.525,46.9 h1.27 r90
  text "~11" at 34.65,46.275 h1.27 r90
  text "~10" at 37.25,45.85 h1.27 r90
  text "~13" at 29.625,45.825 h1.27 r90
  text "SCL" at 19.4,45.65 h1.27 r90
  text "SDA" at 21.975,45.65 h1.27 r90
  text "GND" at 27.075,45.65 h1.27 r90
  text "AREF" at 24.575,44.9 h1.27 r90
  text "Remove R18 if u.FL  / connector is placed" at 46.675,32 h1.3 r90
  text "S" at 38.925,28.6 h2.15
  text "H" at 39.375,28.6 h2.15
  text "D" at 38.925,26.95 h2.15
  text "B" at 39.373,26.679 h2.15
  text "A0" at 51.35,4.325 h1.27 r90
  text "A1" at 53.775,4.325 h1.27 r90
  text "A2" at 56.35,4.325 h1.27 r90
  text "A3" at 58.85,4.325 h1.27 r90
  text "A4" at 61.45,4.325 h1.27 r90
  text "A5" at 63.95,4.325 h1.27 r90
  text "RST" at 33.625,4.3 h1.27 r90
  text "3v3" at 36.225,4.3 h1.27 r90
  text "5v" at 38.65,4.3 h1.27 r90
  text "GND" at 41.2,4.3 h1.27 r90
  text "GND" at 43.775,4.3 h1.27 r90
  text "Vin" at 46.35,4.3 h1.27 r90
  text "IOREF" at 31.1,4.275 h1.27 r90
Bottom Overlay:
  drawing of 2907 lines, arcs and shapes, not listed
  text "RN Reset - D4" at 28.95,47.05 h0.65
  text "Ver" at 20.975,22.4 h1.52
  text "Freq" at 29.15,22.4 h1.52
  text "868" at 28.225,20.075 h1.52
  text "915" at 28.1,17.75 h1.52
Top Solder:
  rectangle: 0.475,36.5 2.575,41
  rectangle: 3.425,37.75 4.975,40.35
Mechanical 1:
  circle w0.127: c15.24,50.8 r1.6
  circle w0.127: c66.04,7.62 r1.6
  circle w0.127: c13.97,2.54 r1.6
  circle w0.127: c66.04,35.56 r1.6